# Altium PCB SensorNode.PcbDoc
Units mil, origin at the board's own origin, x right, y up, seen from the top; angles counter-clockwise.
Board outline 3170 x 2115 mil, 2 copper layers (Top Layer, Bottom Layer); 25 components, 22 nets, 94 pads, 7 vias.
Unrouted connection lines stored in the file: 4.
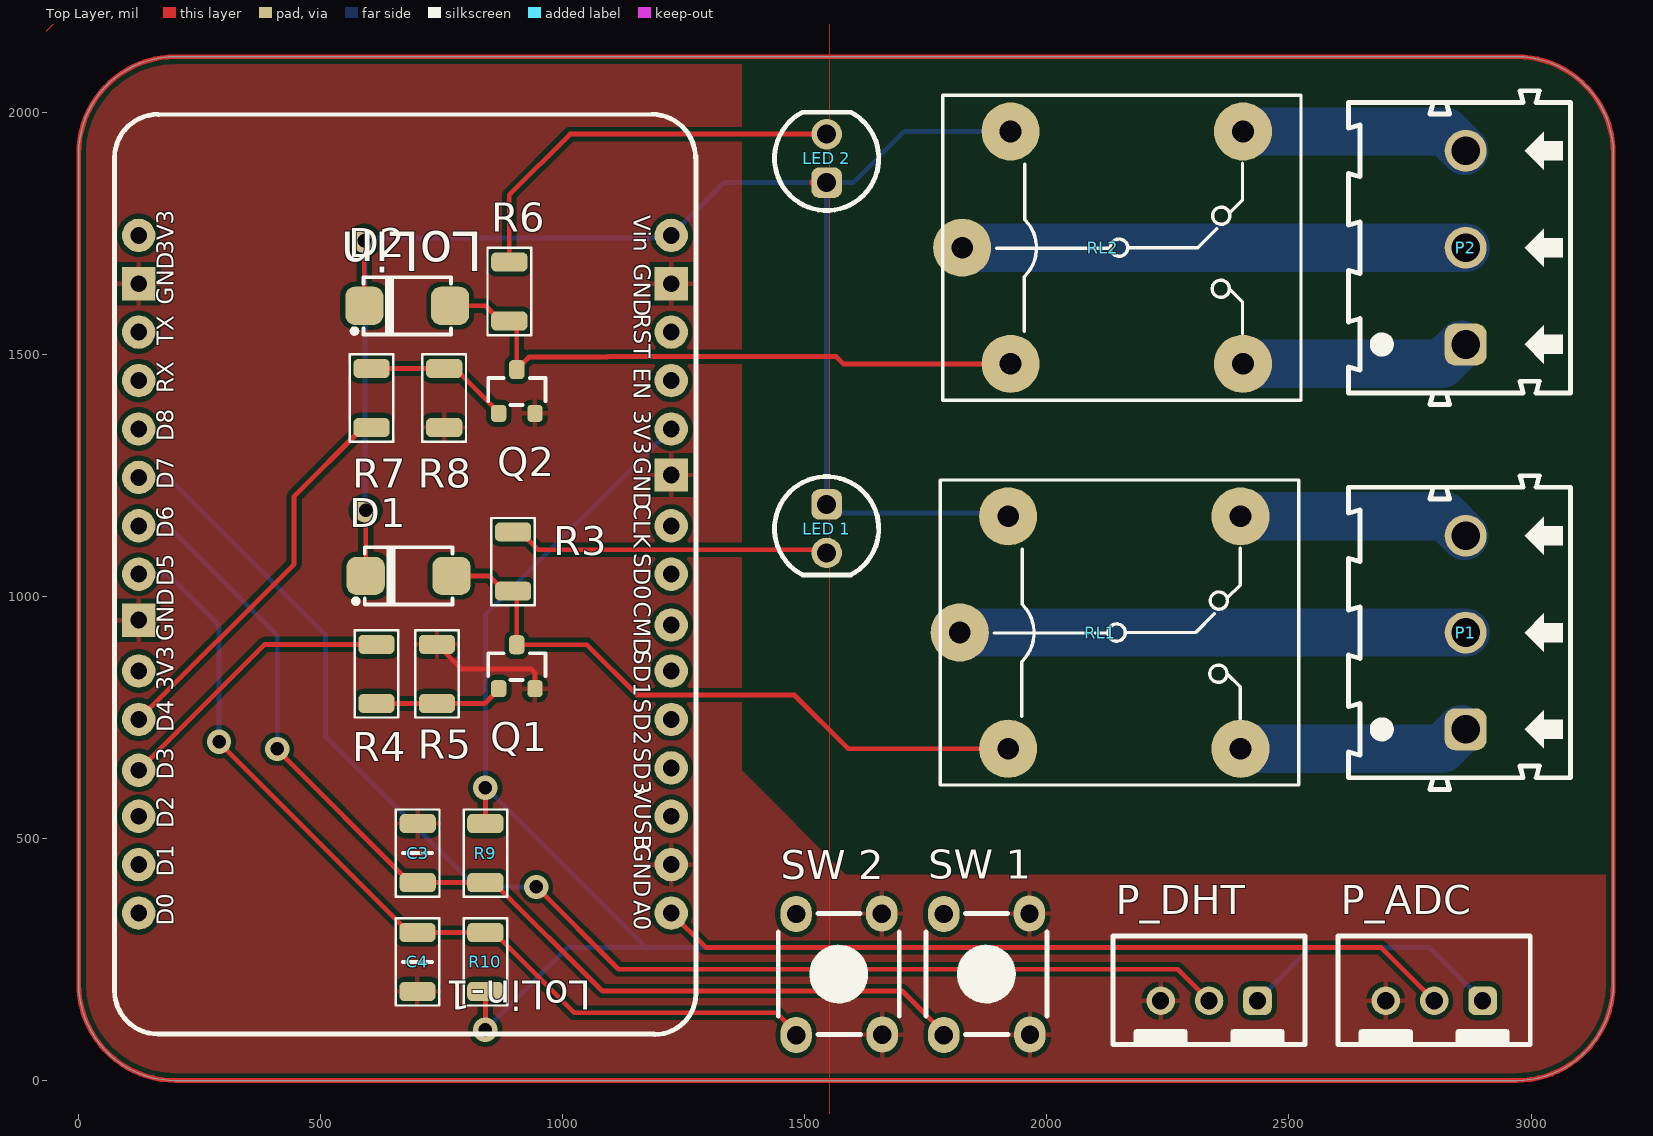
[diagram p0: Top Layer view]
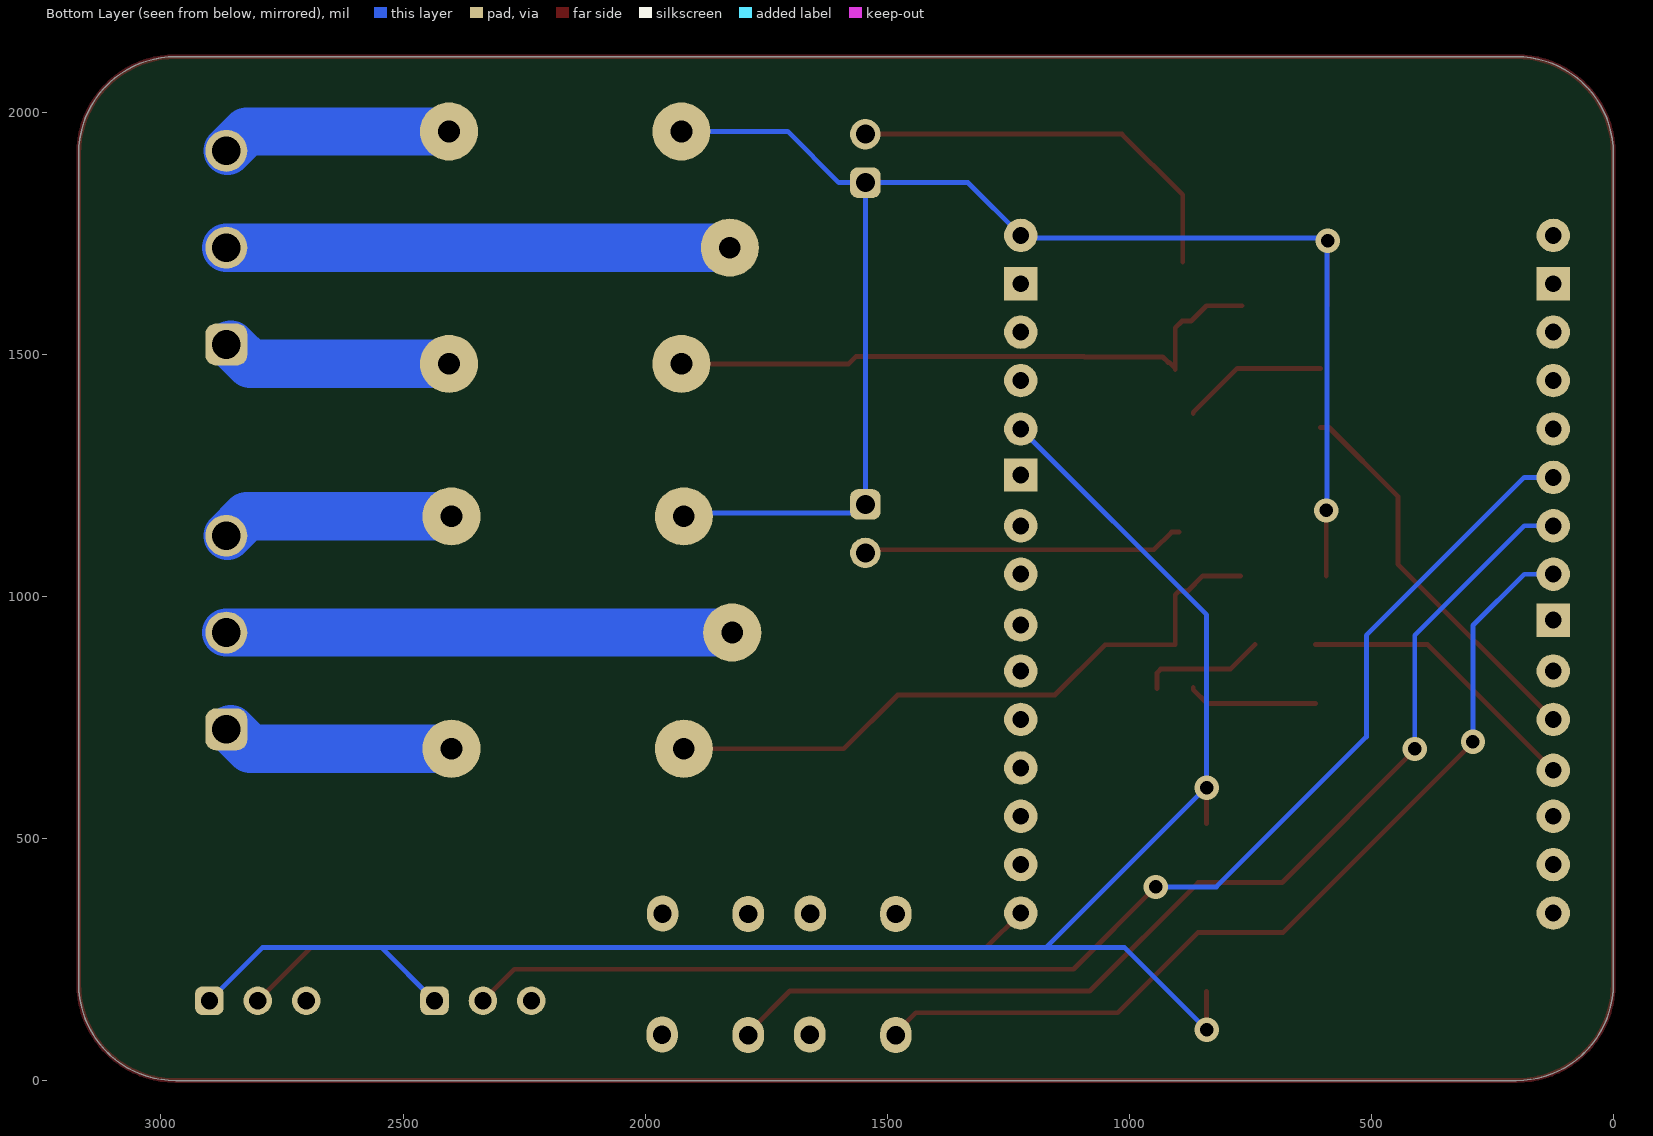
[diagram p1: Bottom Layer view, seen from below]
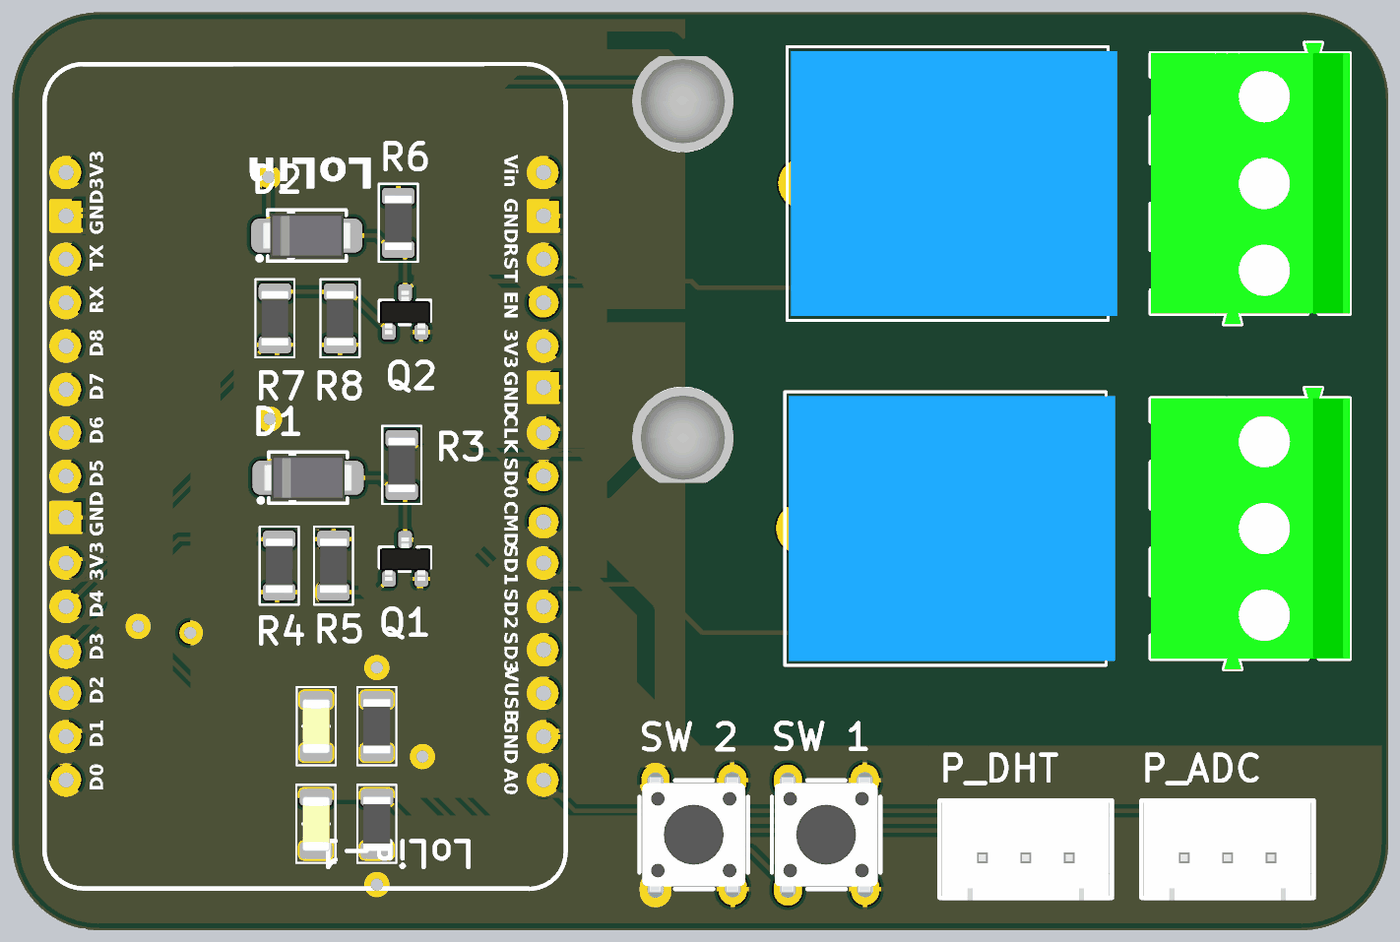
[diagram p2: 3D render of the assembled board from above, using the file's embedded part models]

## Layer stack, top to bottom
Top Solder: solder mask 0.4, Solder Resist, Dk 3.5
Top Layer: signal copper 1.4
Dielectric 1: dielectric 12.6, FR-4, Dk 4.8
Bottom Layer: signal copper 1.4
Bottom Solder: solder mask 0.4, Solder Resist, Dk 3.5

## Board outline
0,200 0,1915 cw(c200,1915) 200,2115 2970,2115 cw(c2970,1915) 3170,1915 3170,200 cw(c2970,200) 2970,0 200,0 cw(c200,200)

## Design rules (kind name [scope] priority, off if disabled: settings)
Clearance [All] p1: gap=10 ignorepadtopadclearanceinfootprint=FALSE except(0: Arc-Hole Track-Hole SMDPad-Hole THPad-Hole Via-Hole Fill-Hole Poly-Hole Region-Hole Text-Hole)
PolygonConnect [All] p1: connectstyle=Relief reliefconductorwidth=10 reliefentries=4 polygonreliefangle="90 Angle" airgapwidth=10
RoutingVias [All] p1: holewidth=28 width=50 viastyle="Through Hole" minholewidth=28 minwidth=50 maxholewidth=28 maxwidth=50
SolderMaskExpansion [All] p1: expansion=4 istentingtop=FALSE
Width [All] p1: maxlimit=10 minlimit=10 preferedwidth=10
30 further rules are at their usual default settings.

## Components (designator, comment, footprint, x,y, rotation, side; value= is the part's Value field where it differs from the comment)
C3 "0.1uf" "C 1206 (3216)" 700,470 r90 top
C4 "0.1uf" "C 1206 (3216)" 700,245 r270 top
D1 "Diode" "DO-214AC (SMA)" 681.42,1042.54 r180 top
D2 "Diode" "DO-214AC (SMA)" 678.58,1600.49 r180 top
"LED 1" "Led" "LED 5MM" 1545,1140 r270 top
"LED 2" "Led" "LED 5MM" 1545,1905 r90 top
LoLin-1 "NodeMCU V3" "LoLin NodeMcu V3" 1175,100 r180 top
P1 "Header 3" SH152-5.08-3P 2622.87,625.5 r90 top
P2 "Header 3" SH152-5.08-3P 2622.87,1420.56 r90 top
P_ADC "Header 3" XH2.54-3P 2700,165 r180 top
P_DHT "Header 3" XH2.54-3P 2235,165 r180 top
Q1 "Transistor NPN" SOT-23 905,855 r90 top
Q2 "Transistor NPN" SOT-23 905,1423.54 r90 top
R3 "R" "R 1206 (3216)" 897.34,1072.05 r270 top
R4 "R" "R 1206 (3216)" 615,840 r270 top
R5 "R" "R 1206 (3216)" 740,840 r90 top
R6 "R" "R 1206 (3216)" 889.51,1630 r270 top
R7 "R" "R 1206 (3216)" 605,1410 r90 top
R8 "R" "R 1206 (3216)" 755,1410 r270 top
R9 "R" "R 1206 (3216)" 840,470 r270 top
R10 "R" "R 1206 (3216)" 840,245 r90 top
RL1 "Relay 10A/12V" RL_SPDT_10A 1820,925.5 r0 top value="Relay SPDT, 10A, 12V"
RL2 "Relay 10A/12V" RL_SPDT_10A 1825,1720.56 r0 top value="Relay SPDT, 10A, 12V"
"SW 1" "Tact Switch" SW/4/DIP/SMALL 1875,220 r0 top
"SW 2" "Tact Switch" SW/4/DIP/SMALL 1570,220 r0 top

## Footprints (in the part's own frame and the unit in brackets; to place one, negate y for a bottom-side part, rotate by r counter-clockwise, add the part's x,y. Pads: shape width x height; smd on the part's side, far side on the other; paste and mask are expansions set on the pad)
"C 1206 (3216)" [mm] "Chip Capacitor, 2-Leads, Body 2.0x1.3mm, IPC Medium Density"
  rrect50% 1x1.9 smd: 1(-1.55,-0.008) 2(1.55,-0.008)
  silkscreen extent -2.29,-1.15 2.29,1.14, body extent -1.6,-0.8 1.6,0.8, height 0.94
"DO-214AC (SMA)" [mm] "Molded Diode, 2-Leads, Body 4.3x2.7mm, IPC Medium Density"
  rrect50% 2x2 smd: 1(2.25,0) 2(-2.25,0)
  silkscreen extent -2.3,-1.5 2.89,1.58, body extent -2.6,-1.3 2.6,1.3, height 2.4
"LED 5MM" [mm]
  round 1.6 hole 1: 1(1.27,0)
  rrect50% 1.6x1.6 hole 1: 2(-1.27,0)
  silkscreen extent -2.73,-2.73 2.42,2.73, body extent -2.84,-2.98 2.77,2.97, height 8.71
"LoLin NodeMcu V3" [mil]
  round 69 hole 35: 3V3(-49,-1246) 3V3(1051,-746) 3V3(1051,-1646) A0(-49,-246) CLK(-49,-1046) CMD(-49,-841) D0(1051,-246) D1(1051,-346) D2(1051,-446) D3(1051,-541) D4(1051,-646) D5(1051,-946) D6(1051,-1046) D7(1051,-1146) D8(1051,-1246) EN(-49,-1346) GND(-49,-346) RST(-49,-1446) RX(1051,-1346) SD0(-49,-946) SD1(-49,-746) SD2(-49,-646) SD3(-49,-546) TX(1051,-1446) VIN(-49,-1646) VUSB(-49,-446)
  rect 69x69 hole 35: GND(-49,-1151) GND(-49,-1546) GND(1051,-851) GND(1051,-1546)
  silkscreen extent -100,-1896 1101,5
"R 1206 (3216)" [mm] "Chip Resistor, 2-Leads, Body 3.1x1.6mm, IPC Medium Density"
  rrect50% 1x1.9 smd: 1(-1.55,0) 2(1.55,0)
  silkscreen extent -2.29,-1.14 2.29,1.14, body extent -1.6,-0.8 1.6,0.8, height 0.6
RL_SPDT_10A [mil] "Relay SPDT, 5 pin, 10A,W 650mil, L 800mil, H 800mil"
  round 120 hole 45: 1(0,0) 2(580,240) 3(580,-240) 4(100,-240) 5(100,240)
  silkscreen extent -40,-315 700,315, body extent -31,-305 721,305, height 602
SH152-5.08-3P [mm] "300V-15A, AWC 24-14"
  rrect50% 2.2x2.2 hole 1.5 mask+0: 1(2.54,-6.15)
  round 2.2 hole 1.5 mask+0: 2(7.62,-6.15) 3(12.7,-6.15)
  silkscreen extent -0.61,-11.65 15.85,0, body extent -0.61,-11.65 15.85,0, height 18
SOT-23 [mm] "SOT23, 3-Leads, Body 3.0x2.5mm (max), Pitch 0.95mm, IPC Medium Density"
  rrect50% 0.9x0.8 smd: 1(-1.15,0.95) 2(-1.15,-0.95)
  rrect50% 1x0.8 smd: 3(1.15,0)
  silkscreen extent -0.71,-1.5 0.7,1.5, body extent -1.28,-1.46 1.27,1.46, height 0.95
SW/4/DIP/SMALL [mil]
  oval 65x75 hole 38: 1(-88,124) 2(89,125) 3(90,-125) 4(-88,-126)
  silkscreen extent -125,-125 125,125, body extent -119,-152 119,152, height 197
XH2.54-3P [mm]
  rrect50% 1.5x1.5 hole 0.9: 1(-5.08,0)
  round 1.5 hole 0.9: 2(-2.54,0) 3(0,0)
  silkscreen extent -7.58,-3.4 2.5,2.4, body extent -7.42,-3.4 2.34,2.44, height 7.21

## Part data
C3 C4: library part "Capacitor NP", "Capacitor non-pol"
D1 D2: "Default Diode", Code_JEDEC=DO-214-AB, LatestRevisionDate=17-Jul-2002, LatestRevisionNote="Re-released for DXP Platform.", PackageReference=SMC, PackageVersion=Sep-1996, Published=8-Jun-2000, Publisher="Altium Limited"
"LED 1" "LED 2": "Typical LED"
LoLin-1: library part "NodeMCU V1.0 ESP-12E_1", "LoLin NodeMCU V3"
P1 P2 P_ADC P_DHT: "Header, 3-Pin"
Q1 Q2: "NPN Bipolar Transistor"
R3 R4 R5 R6 R7 R8 R9 R10: library part Resistor, "Resistor", LatestRevisionDate=17-Jul-2002, LatestRevisionNote="Re-released for DXP Platform.", PackageReference=AXIAL-0.3, Published=8-Jun-2000, Publisher="Altium Limited"
RL1 RL2: library part "Relay 1", "Relay SPDT,10A - 12VDC 5 Pin"
"SW 1" "SW 2": library part "SW SPST-4", "Tact switch 4 pin"

## Via types
v1: diameter 50, hole 28, Top Layer to Bottom Layer, 7 vias

## Nets (pads, with @x,y where several pads share a name; then routed paths per layer and width w, separated by ;. In a path a pad name is that pad's centre, name@x,y a point inside that pad or via, vN(x,y) a via of type N, cw(c..) or ccw(c..) an arc to the next point about the centre after c; other vN are vias at no path point)
+5: "LED 1.2" "LED 2.2" D1.1 D2.1 LoLin-1.VIN RL1.5 RL2.5 | length 3329.4
  Top Layer w10: D2.1 v1(590,1735) ; D1.1 v1(592.83,1177.83)
  Top Layer w20: 1520,1855 1522.78,1852.22 ; 1539.75,1195.25 1545,1190 ; RL1.5@1914.75,1160.25 RL1.5 ; RL2.5@1922.22,1957.78 RL2.5
  Bottom Layer w10: v1(592.83,1177.83) 591.42,1179.25 591.42,1733.58 v1(590,1735) 595.5,1740.5 1218.5,1740.5 LoLin-1.VIN 1333,1855 1545,1855 ; RL1.5 1913.12,1172.38 1562.62,1172.38 1545,1190 1545,1855 ; RL2.5 1705.56,1960.56 1600,1855 1545,1855
A0: LoLin-1.A0 P_ADC.2 | length 1651
  Top Layer w10: LoLin-1.A0 1295,275 2690,275 P_ADC.2
D3: LoLin-1.D3 R4.1 | length 598.7
  Top Layer w10: LoLin-1.D3 384.02,901.02 R4.1
D4: LoLin-1.D4 R7.1 | length 812.6
  Top Layer w10: LoLin-1.D4 445,1067 445,1206.69 587.28,1348.98 R7.1
D5: "SW 2.1" "SW 2.4" C4.1 LoLin-1.D5 R10.2 | length 1897
  Top Layer w10: v1(290,700) 290,697.99 681.97,306.02 C4.1 R10.2 857.72,306.02 1023.74,140 1441,140 1482,99 1482,94
  Bottom Layer w10: LoLin-1.D5 184,1046 290,940 v1(290,700)
D6: "SW 1.1" "SW 1.4" C3.1 LoLin-1.D6 R9.2 | length 2240.3
  Top Layer w10: v1(410,685) 410,683.29 684.31,408.98 C3.1 R9.2 857.72,408.98 1081.69,185 1701,185 1787,99 1787,94
  Bottom Layer w10: LoLin-1.D6 184,1146 410,920 v1(410,685)
D7: LoLin-1.D7 P_DHT.2 | length 2781.8
  Top Layer w10: v1(945,400) 1115,230 2270,230 P_DHT.2
  Bottom Layer w10: LoLin-1.D7 184,1246 510,920 510,710 820,400 v1(945,400)
D8: 
GND: "SW 1.2" "SW 1.3" "SW 2.2" "SW 2.3" C3.2 C4.2 LoLin-1.GND P_ADC.3 P_DHT.3 Q1.2 Q2.2 R5.2 R8.2 | length 269.5
  Top Layer w10: R5.2 791.02,850 935,850 942.4,842.6 Q1.2 ; 1659,345 1659,350 ; 1964,345 1964,350
NetD1_2: D1.2 Q1.3 R3.2 RL1.4 | length 1358.3
  Top Layer w10: D1.2 848.11,1042.54 879.63,1011.02 R3.2 905,1003.37 Q1.3 1049.72,900.28 1153.5,796.5 1478.5,796.5 1589.5,685.5 RL1.4
NetD2_2: D2.2 Q2.3 R6.2 RL2.4 | length 1281.3
  Top Layer w10: D2.2 840.28,1600.49 871.79,1568.98 R6.2 890.68,1568.98 905,1554.66 Q2.3 905,1471.2 917.3,1483.5 919.69,1483.5 931.19,1495 1092.86,1495 1093.36,1495.5 1564.4,1495.5 1567.83,1492.07 1579.33,1480.56 RL2.4
"NetLED 1_1": "LED 1.1" R3.1 | length 665.5
  Top Layer w10: R3.1 912.44,1133.07 949.01,1096.5 1538.5,1096.5 1545,1090
"NetLED 2_1": "LED 2.1" R6.1 | length 816
  Top Layer w10: R6.1 889.51,1829.51 1015,1955 1515,1955
NetP1_1: P1.1 RL1.3 | length 481.6
  Bottom Layer w10: P1.1@2855.99,725.5 P1.1
  Bottom Layer w100: RL1.3 2815.99,685.5 P1.1@2855.99,725.5
NetP1_2: P1.2 RL1.1 | length 1045
  Bottom Layer w100: RL1.1 P1.2
NetP1_3: P1.3 RL1.2 | length 481.6
  Bottom Layer w10: P1.3@2862.54,1125.5 P1.3
  Bottom Layer w100: RL1.2 2822.54,1165.5 P1.3@2862.54,1125.5
NetP2_1: P2.1 RL2.3 | length 476.6
  Bottom Layer w10: P2.1@2855.99,1520.56 P2.1
  Bottom Layer w100: RL2.3 2815.99,1480.56 P2.1@2855.99,1520.56
NetP2_2: P2.2 RL2.1 | length 1040
  Bottom Layer w100: RL2.1 P2.2
NetP2_3: P2.3 RL2.2 | length 476.6
  Bottom Layer w10: P2.3@2862.54,1920.56 P2.3
  Bottom Layer w100: RL2.2 2822.54,1960.56 P2.3@2862.54,1920.56
NetQ1_1: Q1.1 R4.2 R5.1 | length 268.5
  Top Layer w10: R4.2 R5.1 838.82,778.98 867.6,807.76 Q1.1 Q1.1@867.6,811.69
NetQ2_1: Q2.1 R7.2 R8.1 | length 302.2
  Top Layer w10: R7.2 R8.1 776.81,1471.02 867.6,1380.23 Q2.1
V3.3: LoLin-1.3V3 P_ADC.1 P_DHT.1 R9.1 R10.1 | length 3852.8
  Top Layer w10: v1(840,105) R10.1 ; R9.1 v1(840,605)
  Bottom Layer w10: v1(840,105) 1010,275 1171.57,275 ; LoLin-1.3V3@1224,1346 840,962 v1(840,605) 841.57,605 1171.57,275 ; P_DHT.1 2545,275 ; P_ADC.1 2790,275 2545,275 ; 1171.57,275 2545,275
pads on no net: LoLin-1.CLK LoLin-1.CMD LoLin-1.D0 LoLin-1.D1 LoLin-1.D2 LoLin-1.D8 LoLin-1.EN LoLin-1.RST LoLin-1.RX LoLin-1.SD0 LoLin-1.SD1 LoLin-1.SD2 LoLin-1.SD3 LoLin-1.TX LoLin-1.VUSB
copper on no net: | length 47986.6
  Top Layer w10: -5345,-3845 7120,-3845 7120,2570 -5345,2570 -5345,-3845 ; 0,200 ccw(c200,200) 200,0 2970,0 ccw(c2970,200) 3170,200 3170,1915 ccw(c2970,1915) 2970,2115 200,2115 ccw(c200,1915) 0,1915 0,200

## Polygon pours and split planes (outlines as drawn)
GND on Top Layer "GND_L01_P006" (solid, pour order 6): 1355,720 1355,655 1605,405 1570,370 1310,370
GND on Top Layer "GND_L01_P005" (solid, remove dead copper, pour order 5): 1330,425 3310,425 3310,-50 3150,-210 740,-210
GND on Top Layer "GND_L01_P004" (solid, remove dead copper, pour order 4): -330,2295 1350,2295 1360,2305 1370,2295 1370,-170 -230,-170 -370,-310
GND on Top Layer "NONET_L01_P000" (solid, remove dead copper, shelved, pour order 0): -40,2195 1550,2195 1550,-265 1530,-245 -400,-245 -400,1835

## Text inside footprints (layer, text, board x,y; h text height)
LoLin-1: Top Overlay "GND" at 1134,1288 h60 r270; Top Overlay "3V3" at 1134,1385 h60 r270; Top Overlay "EN" at 1134,1472 h60 r270; Top Overlay "RST" at 1134,1584 h60 r270; Top Overlay "GND" at 1134,1687 h60 r270; Top Overlay "Vin" at 1134,1787 h60 r270; Top Overlay "D7" at 209,1221.23 h60 r90; Top Overlay "D8" at 209,1321.11 h60 r90; Top Overlay "RX" at 209,1420.06 h60 r90; Top Overlay "TX" at 209,1519 h60 r90; Top Overlay "GND" at 209,1602.2 h60 r90; Top Overlay "3V3" at 209,1706 h60 r90; Top Overlay "D6" at 209,1120.12 h60 r90; Top Overlay "CMD" at 1134,989.14 h60 r270; Top Overlay "D0" at 209,320 h60 r90; Top Overlay "D1" at 209,421.35 h60 r90; Top Overlay "D2" at 209,521.58 h60 r90; Top Overlay "D3" at 209,621.58 h60 r90; Top Overlay "D4" at 209,720 h60 r90; Top Overlay "3V3" at 209,805.01 h60 r90; Top Overlay "GND" at 209,907 h60 r90; Top Overlay "D5" at 209,1021 h60 r90; Top Overlay "A0" at 1134,373 h60 r270; Top Overlay "GND" at 1134,487 h60 r270; Top Overlay "VUSB" at 1135,605 h60 r270; Top Overlay "SD3" at 1134,687.86 h60 r270; Top Overlay "SD2" at 1134,788.29 h60 r270; Top Overlay "SD1" at 1134,888.71 h60 r270; Top Overlay "SD0" at 1134,1089.57 h60 r270; Top Overlay "CLK" at 1134,1190 h60 r270; Top Overlay "LoLin" at 835,1780 h140 r180